# Altium PCB PCB方案验证板  12V5A 60W.PcbDoc
Units mil, origin at the board's own origin, x right, y up, seen from the top; angles counter-clockwise.
Board outline 3897.64 x 1771.65 mil, 2 copper layers (Top Layer, Bottom Layer); 59 components, 34 nets, 205 pads, 4 vias.
Unrouted connection lines stored in the file: 2.
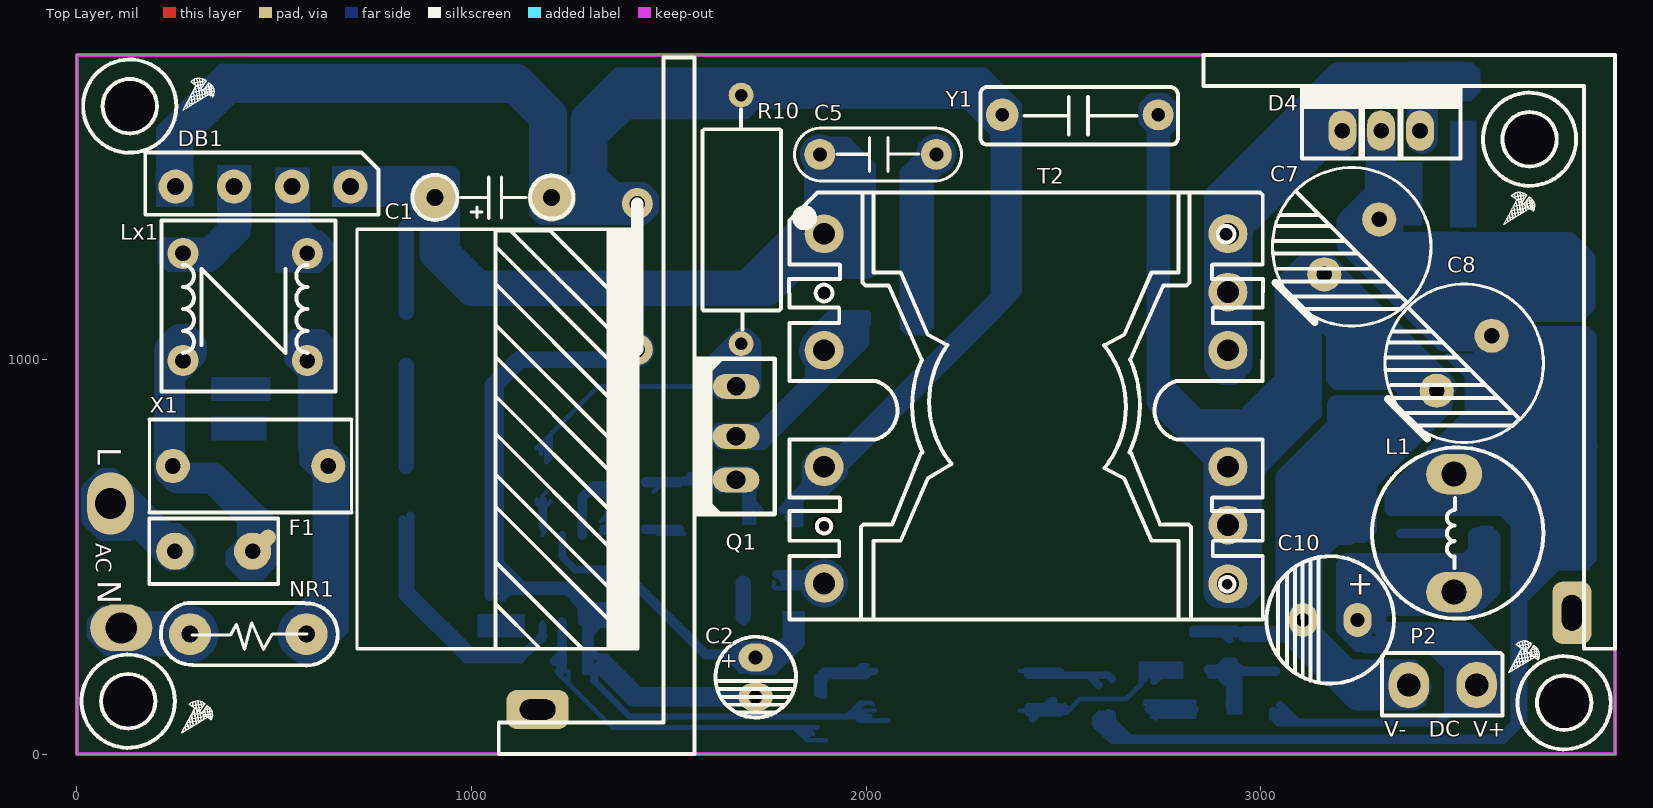
[diagram p0: Top Layer view]
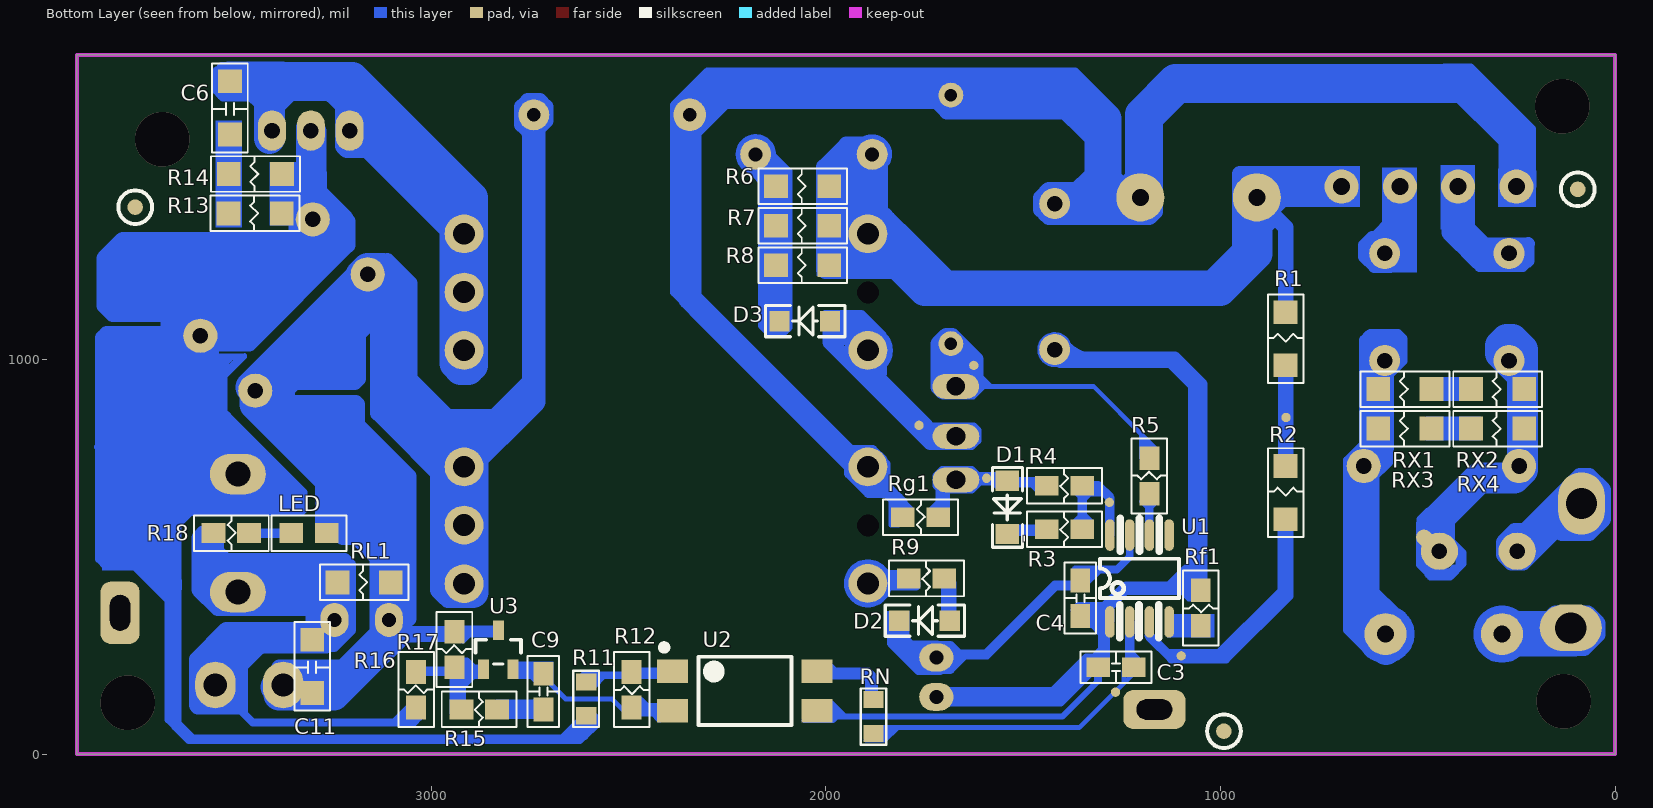
[diagram p1: Bottom Layer view, seen from below]

## Layer stack, top to bottom
Top Solder: solder mask 0.4, Solder Resist, Dk 3.5
Top Layer: signal copper 1.4
Dielectric1: dielectric 12.6, FR-4, Dk 4.8
Bottom Layer: signal copper 1.4
Bottom Solder: solder mask 0.4, Solder Resist, Dk 3.5

## Board outline
0,0 3897.64,0 3897.64,1771.65 0,1771.65

## Design rules (kind name [scope] priority, off if disabled: settings)
Clearance [All] p1: gap=10 ignorepadtopadclearanceinfootprint=FALSE except(0: Arc-Hole Track-Hole SMDPad-Hole THPad-Hole Via-Hole Fill-Hole Poly-Hole Region-Hole Text-Hole)
FabricationTestpoint [(IsPad And (OnTopLayer Or OnBottomLayer))] p1: side=3 testpointundercomponent=TRUE minsize=40 maxsize=100 preferedsize=60 minholesize=0 maxholesize=40 preferedholesize=32 testpointgrid=1 allowsidetop=TRUE allowsidebottom=TRUE usegrid=TRUE gridtolerance=0.01
PolygonConnect [All] p1: connectstyle=Relief reliefconductorwidth=10 reliefentries=4 polygonreliefangle="90 Angle" airgapwidth=10
RoutingLayers [All] p1: top layer_v5=FALSE bottom layer_v5=TRUE
RoutingVias [All] p1: holewidth=28 width=50 viastyle="Through Hole" minholewidth=28 minwidth=50 maxholewidth=28 maxwidth=50
SolderMaskExpansion [All] p1: expansion=4 istentingtop=FALSE
Width [All] p1: maxlimit=196.85 minlimit=10 preferedwidth=39.37
28 further rules are at their usual default settings.

## Classes and differential pairs
component class "12V5A TWO": C1 C2 C3 C4 C5 C7 C8 C9 C10 C11 D1 D2 D3 D4 DB1 F1 NR1 P2 Q1 R1 R2 R3 R4 R5 R6 R7 R8 R9 R10 R11 R12 R13 R14 R15 R16 R17 R18 Rf1 Rg1 RL1 RX1 RX2 RX3 RX4 U1 U2 U3 X1 Y1

## Components (designator, comment, footprint, x,y, rotation, side; value= is the part's Value field where it differs from the comment)
C1 "100uf" "Cin /400V/56uF Wo" 710,1330 r0 top
C2 "47uF/50V" "C Φ5*11 L=2.5" 1720,195 r270 top
C3 "103/0805" 0805-C 1310.08,219.55 r180 bottom
C4 "104/0805" 0805-C 1355.45,440.08 r270 bottom
C5 "630V222" CBB=7.5MM 2030,1520 r0 top
C6 "472" 1206-C 3510.3,1705.08 r270 bottom
C7 "1000uF/16V" "C 1000UF/16V" 3585,1060 r225 top
C8 "1000uF/16V" "C 1000UF/16V" 3300,1355 r225 top
C9 "104/0805" 0805-C 2716,203.27 r270 bottom
C10 "470uF/25V" "C= 3.5MM 8*15" 3107.2,340 r90 top locked
C11 "104" 1206-C 3302.17,290 r270 bottom
D1 "1N4148" "D 1N4148" 1540,625 r90 bottom
D2 "FR104" D/SOD123 1686.02,338 r0 bottom
D3 "FR107" D/SOD123 1989.25,1097 r0 bottom
D4 "MBR20100" "D TO-220" 3305,1580 r0 top
DB1 "KBP307" "DB D=1.1MM" 471.46,1438 r0 top
F1 "250V/3.15A" "F 3.15A L=5MM" 347.07,512.03 r0 top
L1 "4uH" L=7.6MM 3490,560 r90 top locked
LED "Comment" PCBComponent_1 3314.33,593 r0 bottom
Lx1 "18mH" LF=6.9MM 426.18,1133 r0 top (schematic designator T1)
NR1 "8D-11" NTC=7.5mm 581.69,304 r90 top
P2 "12V5A" OUT 3547,177 r270 top
Q1 "SJMN60R38F" MOSFET1 1670,695 r90 top
R1 "750K/1206" 1206-R 834.55,984.92 r90 bottom
R2 "750K/1206" 1206-R 834.55,594.92 r90 bottom
R3 "22R/0805" 0805-R 1440,570 r180 bottom
R4 "47R/0805" 0805-R 1440,680 r180 bottom
R5 "100R/0805" 0805-R 1180,750 r270 bottom
R6 "50K/2510/1W" 1206-R 1990.9,1339.45 r0 bottom
R7 "50K/2510/1W" 1206-R 1990.9,1239.45 r0 bottom
R8 "50K/2510/1W" 1206-R 1990.9,1439.45 r0 bottom
R9 "22R/0805" 0805-R 1790,445 r180 bottom
R10 "0.39/2W" "R  2W" 1683.07,1355 r90 top
R11 "1K/0805" "0805 RC" 2607.28,140 r270 bottom
R12 "1k/0805" 0805-R 2492.13,118.19 r90 bottom
R13 "51R/1206" 1206-R 3378.7,1370.45 r0 bottom
R14 "22R/1206" 1206-R 3377.87,1470.45 r0 bottom
R15 "2.2K/0805" 0805-R 2923.23,113.19 r180 bottom
R16 "39K/1%/0805" 0805-R 3038.39,208.19 r270 bottom
R17 "12.5K/1%/0805" 0805-R 2940.94,310 r270 bottom
R18 "5.1K/0805" 0805-R 3461.61,560 r0 bottom
Rf1 "Res1" 0805-R 1050,325 r90 bottom
Rg1 "10K/0805" 0805-R 1715,600 r0 bottom
RL1 "3.3K/1206" 1206-R 3102.12,435.45 r0 bottom
RN "1K/0805" "0805 RC" 1878.94,95 r270 bottom (schematic designator R11)
RX1 "1M/1206*4" 1206-R 229.92,825.45 r0 bottom
RX2 "1M/1206" 1206-R 229.92,925.45 r0 bottom
RX3 "1M/1206" 1206-R 464.92,825.45 r0 bottom
RX4 "1M/1206" 1206-R 464.92,925.45 r0 bottom
T2 "PQ2620" "T PQ2620" 2620,660 r0 top locked
U1 "OB2269CP" OB2269 1280,335 r90 bottom
U2 "PC817B" LC-SMD-4 2205,160 r180 bottom
U3 "TL431" LC-SOT-23(SOT-23-3) 2829.72,264.21 r180 bottom
X1 "224" CX=10mm 440,730 r180 top
Y1 "222" Y1 2345,1620 r0 top
? "Comment" lUOSI 304.13,95 r225 top
? "Comment" lUOSI 308.07,1673 r225 top
? "Comment" lUOSI 3666.34,247 r225 top
? "Comment" lUOSI 3654.53,1384 r225 top

## Footprints (in the part's own frame and the unit in brackets; to place one, negate y for a bottom-side part, rotate by r counter-clockwise, add the part's x,y. Pads: shape width x height; smd on the part's side, far side on the other; paste and mask are expansions set on the pad)
"0805 RC" [mm]
  rect 1.1x1.3 smd: 1(-1.088,0) 2(1.088,0)
  silkscreen extent -1.81,-0.82 1.81,0.82
0805-C [mil]
  rect 60x50 smd: 1(0.08,0.45) 2(90.08,0.45)
  silkscreen extent -45,-40 135,40
0805-R [mil]
  rect 60x50 smd: 1(0,0) 2(90,0)
  silkscreen extent -50,-45 140,45
1206-C [mil]
  rect 60x60 smd: 1(0.08,0.45) 2(135.08,0.45)
  silkscreen extent -45,-45 180,45
1206-R [mil]
  rect 60x60 smd: 1(0.08,0.45) 2(135.08,0.45)
  silkscreen extent -45,-45 180,45
"C 1000UF/16V" [mm]
  round 2.2 hole 1: 1(5,0) 2(0,0)
  silkscreen extent -2.6,-5.1 7.6,5.1
"C Φ5*11 L=2.5" [mm]
  oval 1.8x2.2 hole 0.9: 1(-1.27,0) 2(1.27,0)
  silkscreen extent -2.6,-2.6 2.6,2.6
"C= 3.5MM 8*15" [mm]
  oval 2.2x1.8 hole 0.9: 1(0,-3.5) 2(0,0)
  silkscreen extent -4.1,-5.85 4.1,2.35
CBB=7.5MM [mm]
  round 2 hole 0.9: 1(-3.75,0) 2(3.75,0)
  silkscreen extent -5.37,-1.71 5.37,1.7
"Cin /400V/56uF Wo" [mm]
  round 3.1 hole 1.1: 1(5.02,2.05) 2(12.52,2.05)
  silkscreen extent 0,-27 18.08,3.5
CX=10mm [mm]
  round 2.2 hole 1: 1(5,0) 2(-5,0)
  silkscreen extent -6.5,-3 6.5,3
"D 1N4148" [mm]
  rect 1.3x1.5 smd: +(1.713,0) -(-1.713,0)
  silkscreen extent -2.56,-0.96 2.56,0.95
"D TO-220" [mm]
  oval 1.8x2.6 hole 1: 1(-2.5,0) 1(2.5,0) 2(0,0)
  silkscreen extent -5.1,-1.8 5.1,2.7
D/SOD123 [mm]
  rect 1.3x1.3 smd: 1(0,0) 2(3.248,0)
  silkscreen extent -0.95,-1 4.15,1
"DB D=1.1MM" [mm]
  round 2.2 hole 1.1: +(5.625,0) -(-5.625,0) L(-1.875,0) N(1.875,0)
  silkscreen extent -7.58,-1.81 7.42,2.19
"F 3.15A L=5MM" [mm]
  round 2.4 hole 1: 1(-2.512,0.05) 2(2.487,0.05)
  round 0 all layers, no hole: ""(-3.063,-0.525)
  oval 1x2.2 all layers, no hole rot 135: ""(3.063,0.525)
  silkscreen extent -4.16,-2.05 4.14,2.15
L=7.6MM [mm]
  oval 2.6x3.6 hole 1.6: 1(3.8,0) 2(-3.8,0)
  silkscreen extent -5.51,-5.74 5.51,5.28
LC-SMD-4 [mm]
  rect 2x1.5 smd: A(-4.65,1.27) C(4.65,1.27) E(4.65,-1.27) K(-4.65,-1.27)
  silkscreen extent -5.4,-2.2 3,3, body extent -5.02,-2.42 5.01,2.42, height 3.9
LC-SOT-23(SOT-23-3) [mm]
  rect 0.7x1.25 smd: A(0,1.25) K(0.95,-1.25) R(-0.95,-1.25)
  silkscreen extent -1.46,-0.9 1.46,0.65, body extent -1.5,-1.5 1.5,1.5, height 1.3
LF=6.9MM [mm]
  round 2 hole 1: 1(4,-3.45) 2(4,3.45) 3(-4,-3.45) 4(-4,3.45)
  silkscreen extent -5.38,-5.45 5.81,5.56
lUOSI [mil]
  silkscreen extent -39,-35 56,31
MOSFET1 [mm]
  oval 1.6x3 hole 1.2: D(2.799,-0.005) G(0,0) S(6.012,-0.02)
  silkscreen extent -2.2,-2.51 7.86,2.49
NTC=7.5mm [mm]
  round 2.7 hole 1.1: 1(0,0) 2(0,7.5)
  silkscreen extent -2.02,-2.01 2.02,9.38
OB2269 [mil]
  oval 80x24 smd: 1(0,0) 2(0,-50) 3(0,-100) 4(0,-150) 5(220,-150) 6(220,-100) 7(220,-50) 8(220,0)
  silkscreen extent -40,-175 262,25
OUT [mm]
  oval 3x2.6 hole 1.5: GND(0.051,-4.369) VCC(0.051,0)
  silkscreen extent -2.01,-6.1 2.01,1.65
PCBComponent_1 [mil]
  rect 60x50 smd: 1(-50,33) 2(40,33)
  silkscreen extent -100,-12 90,78
"R  2W" [mm]
  round 1.6 hole 0.8: 1(8,0) 2(-8,0)
  silkscreen extent -7.09,-2.57 7.06,2.5
"T PQ2620" [mm]
  round 2.5 hole 1.4: 1(-18.461,16.724) 3(-18.461,9.223) 4(-18.461,1.723) 6(-18.461,-5.776) 7(7.539,-5.801) 8(7.539,-2.026) 9(7.539,1.724) 10(7.539,9.224) 11(7.539,12.973) 12(7.539,16.724)
  round 0 hole 1.4: 2(-18.461,12.949) 5(-18.461,-2.052)
  silkscreen extent -20.71,-8.11 9.78,19.39
Y1 [mm]
  round 2.1 hole 0.85: 1(0,0)
  round 2 hole 0.85: 2(10.033,0)
  silkscreen extent -1.4,-1.91 11.3,1.79

## Part data
C1 C2 C7 C8 C10: library part "Cap Pol2", "Polarized Capacitor (Axial)"
C3 C4 C5 C6 C9 C11 X1 Y1: library part Cap, "Capacitor"
D1 D2 D3 D4: library part "Diode BAS116", "Silicon Low Leakage Diode"
DB1: library part Bridge1, "Full Wave Diode Bridge"
F1: library part "Fuse 2", "Fuse"
L1: library part Inductor, "Inductor"
Lx1: library part "Trans Ideal", "Transformer (Ideal)"
NR1: library part NTC
P2: library part "Header 2", "Header, 2-Pin"
Q1: library part NMOS-2, "N-Channel Power MOSFET"
R1 R2 R3 R4 R5 R6 R7 R8 R9 R10 R11 R12 R13 R14 R15 R16 R17 R18 Rg1 RL1 RN RX1 RX2 RX3 RX4: library part Res1, "Resistor"
Rf1: "Resistor"
T2: library part T
U2: library part Optoisolator1, "4-Pin Phototransistor Optocoupler"

## Free pads (board coordinates)
  oval 118.11x157.48 hole 78.74: 1(85,635)
  oval 157.48x118.11 hole 78.74: 1(112.2,320)
  round 78.74 hole 39.37: 2(1420,1395) 3(1420,1025)
  round 39.37 smd far side: 6(94.49,1431) 6(991.14,58) 6(3750,1386)
  round 23.62 smd far side: 6(833.66,853) 6(1099.41,249) 6(1265.75,157) 6(1281.5,638) 6(1592.52,699) 6(1625,985) 6(1763.78,833)
  rrect50% 157.48x98.43 hole 51.18 slot 90.55 at 0 deg: 126(1167.32,113)
  rrect50% 98.43x157.48 hole 51.18 slot 90.55 at 90 deg: 126(3788.39,358)
  oct 78.74x39.37 on Bottom Solder rot 45: ""(3107.22,561.98) ""(3107.35,639.02) ""(3177.1,632.98) ""(3178.21,708.02) ""(3244.03,702.98) ""(3246.13,782.02) ""(3312.93,771.98) ""(3319.94,859.02) ""(3379.86,842.98) ""(3604.27,709.98) ""(3658.53,661.02)
  oct 78.74x39.37 on Bottom Solder rot 135: ""(3135.83,282) ""(3175.2,242) ""(3212.52,203.73) ""(3218.5,1072) ""(3229.33,1146) ""(3253.86,163.73) ""(3290.35,999) ""(3298.23,1079) ""(3299.21,1261) ""(3358.27,1279) ""(3358.27,938) ""(3365.81,1198.33) ""(3375,1007) ""(3432.41,1135.67) ""(3434.06,1207) ""(3434.06,1274) ""(3499.02,1073) ""(3500.98,1207) ""(3509.76,283.73) ""(3512.8,1132) ""(3545.2,248.73) ""(3572.83,1146) ""(3646.65,1101.91) ""(3675.2,1020.91)
  oct 78.74x39.37 on Bottom Solder: ""(3317.75,385.52) ""(3328.9,464.48) ""(3364.17,299) ""(3397.8,383.48) ""(3413.55,465.48) ""(3418.31,299) ""(3466.54,299) ""(3571.31,641.23)
  oct 39.37x78.74 on Bottom Solder: ""(3566.52,785.13) ""(3566.52,877.63) ""(3566.52,970.13) ""(3631.32,879.87) ""(3631.32,975.87) ""(3633.29,790.87) ""(3696.68,750.31) ""(3698.65,847.31) ""(3698.65,939.31)

## Via types
v1: diameter 137.8, hole 137.8, Top Layer to Bottom Layer, 4 vias

## Nets (pads, with @x,y where several pads share a name; then routed paths per layer and width w, separated by ;. In a path a pad name is that pad's centre, name@x,y a point inside that pad or via, vN(x,y) a via of type N, cw(c..) or ccw(c..) an arc to the next point about the centre after c; other vN are vias at no path point)
GND: C7.1 C8.1 C10.2 C11.2 LED.1 P2.GND R17.1 RL1.1 T2.7 T2.8 T2.9 U3.A Y1.2 | length 3895.4
  Bottom Layer w10: Y1.2 2740,904.67 T2.9@2907.47,737.19 ; T2.7@2905,438.46 T2.8@2905,580.22 ; T2.8 T2.8@2905,580.22 ; C10.2@3100,305 C10.2@3100,332.8 ; RL1.1@3100,415 C10.2@3100,332.8 ; 3137.2,305 3172.2,270 3175,270 3295,150 P2.GND@3385,150 ; T2.8@2905,580.22 2905,734.72 T2.9@2907.47,737.19 ; T2.9@2907.47,737.19 T2.9 2932.22,727.85 3099.41,895.04 3099.41,1154.41 C8.1 3445.81,930.81 C7.1 3107.2,582.2 3107.2,560 C10.2 C10.2@3100,332.8
  Bottom Layer w23.62: U3.A 2937.52,313.43 R17.1 3022.32,310 3037.32,295 3119.09,295 ; 3107.2,560 LED.1
GND1: C1.2 C2.2 C3.1 C4.2 DB1.- pad.2 R10.1 Rf1.2 Rg1.2 T2.4 U1.1 U2.E Y1.1 | length 6130.7
  Bottom Layer w10: Rf1.2@1060,415 1240,415 ; C1.2@1210,1420 C1.2@1230,1440 ; C1.2@1215,1455 C1.2@1230,1440 ; U1.1@1280,337.08 U1.1 ; C4.2 1340,335 U1.1 ; C2.2 1385,145 C3.1 ; Rg1.2 1805,639.66 T2.4 1952.85,727.85 2340,1115 2340,1655 2305,1690 1360,1690 1265,1595 1265,1475 C1.2@1230,1440 ; U2.E 1977.6,110 1962.6,95 1400.75,95 1310,185.75 C3.1 ; U1.1 1290.35,324.65 1290.35,239.65 C3.1
  Bottom Layer w23.62: 1240,425 1280,385 1280,375 U1.1@1280,337.08
  Bottom Layer w39.37: 1270,1360 pad.2@1435.47,1360
  Bottom Layer w78.74: DB1.-@247.36,1465 247.36,1552.36 405,1710 1115,1710 1202.91,1622.09 C1.2 1404.29,1410.71 pad.2
NetC1_1: C1.1 C5.1 DB1.+ R1.2 R6.1 R7.1 R8.1 T2.1 | length 3262
  Bottom Layer w10: R1.2 835,1338.08 895.96,1399.04 C1.1@907.63,1387.37
  Bottom Layer w19.68: 991.14,1215 1740.16,1215
  Bottom Layer w39.37: C5.1 C5.1@1904.05,1498.32 ; T2.1 1955,1318.41 1957.14,1320.55 ; 1990,1305 R6.1@1990,1353.41 ; C5.1@1904.05,1498.32 cw(c1882.36,1520) 1913.03,1520 cw(c1882.36,1520) C5.1@1904.05,1498.32 ; C5.1@1904.05,1498.32 1990,1412.36 R6.1@1990,1353.41 ; 1957.14,1320.55 cw(c1893.19,1318.41) 1957.18,1318.41 cw(c1893.19,1318.41) 1847.94,1273.16 cw(c1893.19,1318.41) 1957.14,1320.55 ; 1957.14,1320.55 R6.1@1990,1353.41
  Bottom Layer w78.74: C1.1 907.63,1387.37 907.63,1267.37 1000,1175 1749.78,1175 1847.94,1273.16 T2.1
NetC2_1: C2.1 C4.1 D2.2 U1.7 | length 814.2
  Bottom Layer w10: C4.1 1375,420 1415,420 1590,245 C2.1 1785,245 1817.87,277.87 D2.2@1817.87,330
  Bottom Layer w19.68: U1.7 1230,500 1262.5,467.5 1327.5,467.5 C4.1
NetC3_2: C3.2 pad.6@1265.75,157 RN.2 U1.2 | length 844.9
  Bottom Layer w10: C3.2 1225,225 1230,230 U1.2
  Bottom Layer w11.81: C3.2 1220,230 C3.2@1225,225 ; C3.2@1245,210 1245,180 1357.82,67.18 RN.2@1876.97,67.18
NetC5_2: C5.2 D3.2 R6.2 R7.2 R8.2 | length 590.6
  Bottom Layer w10: 2125,1135 2125,1205 ; R7.2@2125,1225 2125,1239 2125,1405 ; C5.2 C5.2@2182.64,1525
  Bottom Layer w39.37: C5.2@2155.5,1497.86 ccw(c2177.64,1520) 2208.95,1520 ccw(c2177.64,1520) C5.2@2155.5,1497.86
  Bottom Layer w59.06: 2125,1405 2125,1467.36 2155.5,1497.86 C5.2
NetC6_1: C6.1 D4.1 T2.10 T2.11 T2.12 | length 1190.4
  Bottom Layer w10: T2.10@2905,1030 T2.12@2905,1325.28 ; T2.12 2916.81,1456.81 3040,1580 3206.58,1580 3206.58,1656.58 3265,1715 3375,1715 3403.43,1686.57 D4.1@3403.43,1580
NetC6_2: C6.2 R13.2 R14.2
NetC7_2: C7.2 C8.2 D4.2 L1.1 R11.2 R13.1 R14.1 | length 15135.3
  Bottom Layer w10: D4.2@3275,1580 3285.43,1569.57 3300,1555 3300,1413.78 3300,1409.09 3300,1385 3275,1360 3295,1360 C8.2 ; R14.1@3357.52,1460 3367.52,1470 R14.1 ; R13.1@3367.36,1358.58 R13.1 ; L1.1 3575,794.61 ; L1.1@3503.27,709.61 3585,791.34 3585,828.35 3585,883.74 3585,952.24 3585,974.96 3585,1007.76 3585,1015.71 3585,1017.52 C7.2 ; 3517.72,1075 3526.57,1083.86 3527.72,1085 3547.24,1085 C7.2@3554.13,1085
  Bottom Layer w11.81: R11.2@2600.39,105 2600.39,80.35 2640.75,40 ; 3600.39,660 3600.39,648.39 3638.78,610 3638.78,627.36 3631.89,634.25 ; 3624.02,660 3631.89,652.13 3631.89,634.25 ; 3631.89,620 3631.89,620.12 ; 3637.8,685 3642.72,680.08 3642.72,660 3642.72,593.86 ; 3654.53,665 3654.53,660 3654.53,632.28 ; 3655.51,581.06 3654.53,582.05 3654.53,611.77 ; 3672.24,650 3654.53,632.28 ; 3687.01,655 3654.53,622.52 ; 3702.76,660 3654.53,611.77 ; 3631.89,620.12 3631.89,634.25 ; 3631.89,620.12 3602.01,650 3616.14,650 3631.89,634.25 ; 3649.61,617.6 3654.53,622.52 ; 3649.61,617.6 3649.61,627.36 3654.53,632.28 ; 3649.61,617.6 3649.61,610 3652.76,610 3654.53,611.77 ; 3654.53,611.77 3654.53,622.52 ; 3654.53,622.52 3654.53,632.28
  Bottom Layer w19.68: 2640.75,40 3604.25,40 3642.72,78.46 3642.72,593.86 ; L1.1 3503.27,709.61 3526.97,709.61 3530.37,706.2 3576.57,660 3642.72,593.86 ; 3517.72,1075 3517.72,1045.04 3522.76,1040 ; 3547.24,1095 3547.24,1085 3547.24,1045.51 3547.24,1040 3547.24,1015.51 ; 3568.9,935 3560.04,943.86 3547.24,956.65 3547.24,977.95 3547.24,978.7 3547.24,979.76 3547.24,1015.51 ; 3577.76,985 3566.02,996.73 3565.65,997.11 3565.12,997.64 3547.24,1015.51 ; 3637.8,1135 3637.8,1124.17 3637.8,1115 3637.8,1068.54 3641.34,1065 3646.34,1060 3649.61,1056.73 ; 3643.7,1025 3649.61,1030.91 3649.61,1035.91 3649.61,1044.92 3649.61,1056.73 ; 3649.61,1155 3649.61,1124.17 3649.61,1115 3649.61,1065 3649.61,1060 3649.61,1056.73 ; 3654.53,582.05 3642.72,593.86 ; 3655.51,581.06 3686.02,550.55 ; 3666.34,1040 3649.61,1056.73
  Bottom Layer w39.37: 3270.35,1310 3251.97,1328.39 3244.09,1336.26 3244.09,1357.87 3244.09,1369.17 3285.43,1410.51 3285.43,1420 ; D4.2@3285.43,1580 3285.43,1569.57 3285.43,1420 ; 3287.4,1420 3285.43,1420 ; D4.2 3305,1355.12 C8.2@3305.12,1355 ; 3306.1,1409.29 3306.1,1425 ; 3307.09,1303.82 3332.68,1303.82 ; 3311.02,1420.94 3311.02,1445 ; C8.2@3322.83,1365 D4.2@3322.83,1590 ; 3332.68,1435 3332.68,1303.82 ; 3336.61,1295 3332.68,1298.94 3332.68,1303.82 ; 3379.92,1295 3410.94,1295 3565.94,1140 ; 3386.81,1285 3386.81,1284.45 3546.26,1125 ; 3422.24,1305 3499.69,1305 3500.87,1303.82 ; 3425.2,660 3576.57,660 3600.39,660 3624.02,660 3642.72,660 3654.53,660 3702.76,660 ; 3526.57,1100 3526.57,1095 3526.57,1083.86 3526.57,1066.18 3547.24,1045.51 C7.2@3552.76,1040 ; 3535.43,795 3535.43,834.17 3535.43,967.95 3547.24,979.76 3565.12,997.64 3579.72,1012.24 ; 3538.39,775 3538.39,781.73 3538.39,825 ; 3546.26,770 3546.26,789.61 3546.26,832.87 ; 3553.15,1300 3553.15,1275.75 3693.9,1135 ; 3557.09,843.7 3546.26,832.87 ; C7.2@3563.98,1085 3573.5,1085 C7.2@3600.51,1085 ; C7.2@3570.87,1040 C7.2@3552.76,1040 ; 3575.79,819.13 3560.04,834.88 3560.04,858.78 3560.04,943.86 3560.04,950 3585,974.96 3601.4,991.36 ; 3577.76,945 3585,952.24 3612.76,980 ; C7.2@3579.72,1040 3579.72,1013.03 ; 3583.66,1285 3593.19,1285 3738.19,1140 ; 3585,1015.71 3581.02,1011.73 ; C7.2 3588.62,1060 3593.5,1064.88 C7.2@3593.62,1065 ; C7.2@3593.5,1065 C7.2@3593.62,1065 ; C7.2@3603.35,1040 3603.35,1035.87 3585,1017.52 3580.12,1012.64 ; 3608.27,1130 3608.27,1096.89 ; C7.2@3611.42,1085 C7.2@3609.53,1085 ; 3622.05,1015 3622.05,1012.01 3601.4,991.36 ; 3622.05,1115 3626.38,1115 ; 3623.03,980 3612.76,980 ; 3654.53,1040 3649.61,1044.92 3634.53,1060 ; 3655.51,1030 3649.61,1035.91 C7.2@3625.51,1060 ; 3675.2,1290 3675.2,1275.31 3780.51,1170 ; 3702.76,1295 3702.76,1286.54 3794.29,1195 ; 3723.43,790 3726.38,792.95 3726.38,1030 ; 3731.3,1290 3736.34,1290 3791.34,1235 ; 3765.75,799.29 3765.75,1021.97 3727.72,1060 ; 3789.37,773.03 3789.37,1048.27 3777.64,1060 3727.72,1060 ; 3831.69,705 3831.69,1055 3821.69,1065 3649.61,1065 3641.34,1065 3629.53,1065 ; 3285.43,1420 3280.79,1420 3211.61,1350.83 3211.61,1290 3461.61,1040 3522.76,1040 3547.24,1040 C7.2@3552.76,1040 ; 3332.68,1303.82 3445,1303.82 ; 3445,1303.82 3500.87,1303.82 ; 3445,1303.82 3590.55,1158.27 ; 3500.87,1303.82 3635.83,1168.86 3635.83,1124.17 ; 3500.87,1303.82 3612.68,1303.82 ; 3538.39,825 3546.26,832.87 ; 3538.39,825 3538.39,837.13 3538.39,969.84 3547.24,978.7 3565.65,997.11 3579.72,1011.18 3579.72,1012.24 ; 3546.26,832.87 3546.26,845 3546.26,976.97 3547.24,977.95 3566.02,996.73 3581.02,1011.73 ; C7.2@3552.76,1040 3579.72,1013.03 ; 3579.72,1012.24 3579.72,1013.03 ; 3579.72,1012.24 3580.12,1012.64 ; 3579.72,1013.03 3580.12,1012.64 ; 3580.12,1012.64 3581.02,1011.73 ; 3581.02,1011.73 3585,1007.76 3601.4,991.36 ; 3590.55,1158.27 3601.38,1147.44 ; 3590.55,1158.27 3590.55,1094.96 C7.2@3600.51,1085 ; C7.2@3593.62,1065 C7.2@3601.38,1065 ; C7.2@3593.62,1065 C7.2@3601.38,1072.76 ; C7.2@3600.51,1085 C7.2@3601.38,1084.13 ; C7.2@3600.51,1085 C7.2@3601.38,1085 ; 3601.4,991.36 3612.76,980 ; C7.2@3601.38,1065 C7.2@3620.51,1065 ; C7.2@3601.38,1065 C7.2@3601.38,1072.76 ; C7.2@3601.38,1065 3601.38,1060 C7.2@3625.51,1060 ; C7.2@3601.38,1072.76 C7.2@3601.38,1084.13 ; C7.2@3601.38,1072.76 C7.2@3607.07,1078.44 ; C7.2@3601.38,1084.13 C7.2@3601.38,1085 ; C7.2@3601.38,1084.13 C7.2@3607.07,1078.44 ; C7.2@3601.38,1085 C7.2@3601.38,1090 ; C7.2@3601.38,1085 C7.2@3609.53,1085 ; C7.2@3601.38,1090 3608.27,1096.89 ; C7.2@3601.38,1090 3601.38,1147.44 ; 3601.38,1147.44 3630.1,1118.72 ; C7.2@3607.07,1078.44 C7.2@3620.51,1065 ; C7.2@3607.07,1078.44 C7.2@3611.57,1082.95 ; 3608.27,1096.89 3626.38,1115 ; 3608.27,1096.89 3608.27,1086.26 C7.2@3609.53,1085 ; C7.2@3609.53,1085 C7.2@3611.57,1082.95 ; C7.2@3611.57,1082.95 3629.53,1065 ; C7.2@3611.57,1082.95 3635.83,1107.2 3635.83,1112.99 ; 3612.68,1303.82 3618.11,1303.82 ; 3612.68,1303.82 3792.32,1124.17 3649.61,1124.17 3637.8,1124.17 3635.83,1124.17 ; 3618.11,1303.82 3750.39,1303.82 ; 3618.11,1303.82 3806.93,1115 ; C7.2@3620.51,1065 3629.53,1065 ; C7.2@3620.51,1065 C7.2@3625.51,1060 ; C7.2@3625.51,1060 3634.53,1060 ; 3626.38,1115 3630.1,1118.72 ; 3626.38,1115 3633.82,1115 ; 3629.53,1065 3634.53,1060 ; 3630.1,1118.72 3635.55,1124.17 3635.83,1124.17 ; 3630.1,1118.72 3633.82,1115 ; 3633.82,1115 3635.83,1115 ; 3633.82,1115 3635.83,1112.99 ; 3634.53,1060 3646.34,1060 3649.61,1060 3727.72,1060 ; 3635.83,1112.99 3635.83,1115 ; 3635.83,1115 3637.8,1115 3649.61,1115 3806.93,1115 ; 3635.83,1115 3635.83,1124.17 ; 3750.39,1303.82 3781.81,1303.82 3828.74,1256.89 3828.74,1136.81 3806.93,1115 ; 3750.39,1303.82 3806.93,1247.28 3806.93,1115
  Bottom Layer w78.74: 3234.25,1348.03 3244.09,1357.87 3300,1413.78 3303.15,1416.93 3303.15,1470 ; 3251.97,1350 3251.97,1328.39 3251.97,1286.42 3288.39,1250 ; 3255.91,1365 3300,1409.09 3300.2,1409.29 ; 3265.75,1320 3290.91,1320 C8.2@3295,1315.91 ; C8.2@3295,1360 C8.2@3295,1315.91 ; 3453.74,1095 3526.57,1095 3547.24,1095 3563.5,1095 3573.5,1085 3593.5,1065 3593.5,1064.88 3593.5,1047.2 C7.2@3591.3,1045 ; 3475.91,1060 3295,1240.91 C8.2@3295,1315.91 ; L1.1 3490,733.35 3538.39,781.73 3546.26,789.61 3575.79,819.13 3585,828.35 3593.5,836.85 ; 3505.91,1105 3307.09,1303.82 C8.2@3295,1315.91 ; C7.2@3576.77,1094.8 C7.2@3576.77,1095 ; 3650.59,935 3636.26,935 3585,883.74 3560.04,858.78 3546.26,845 3538.39,837.13 3535.43,834.17 3421.26,720 3421.26,690.98 3432.24,680 3504.17,680 3530.37,706.2 3651.57,827.4 3651.57,1020 ; 3687.99,782.8 3687.99,1035.2
NetC9_1: C9.1 R12.1 U2.K U3.K | length 451.9
  Bottom Layer w10: U2.K 2487.13,110 2492.13,105 2507.24,105 2542.24,140 2659.41,140 2724.41,205 2782.32,205 U3.K
NetC9_2: C9.2 R15.2 | length 108.8
  Bottom Layer w10: C9.2@2724.41,115 R15.2@2833.23,115
NetD1_+: D1.+ pad.6@1592.52,699 Q1.G R4.1 Rg1.1 | length 236.2
  Bottom Layer w10: R4.1 1527.58,680 D1.+ 1667.42,692.42 Q1.G
NetD1_-: D1.- R3.1 | length 105.1
  Bottom Layer w10: R3.1 1460,570 1472.42,557.58 D1.-
NetD2_1: D2.1 R9.2 | length 99.1
  Bottom Layer w10: D2.1@1690,330 1700,340 R9.2@1700,425
NetD3_1: D3.1 Q1.D T2.3 | length 585.6
  Bottom Layer w10: Q1.D 1705.2,805.2 T2.3@1881.23,981.23 ; T2.3 1915.38,1023.13 1933.03,1040.77 D3.1
  Bottom Layer w39.37: T2.3@1881.23,981.23 cw(c1893.19,1023.13) T2.3@1933.03,1040.77
NetDB1_L: DB1.N Lx1.2 | length 200.7
  Bottom Layer w39.37: DB1.N@542.64,1465 542.64,1320.67 Lx1.2@582.48,1280.83
NetDB1_N: DB1.L Lx1.4 | length 285.8
  Bottom Layer w39.37: Lx1.4@267.52,1280.83 350.83,1280.83 395,1325 DB1.L@395,1465
NetF1_1: F1.1 F1.@226.5,491.36 pad.1@85,635 | length 316.8
  Bottom Layer w10: F1.1@203.86,505 F1.1@226.5,482.36
  Bottom Layer w39.37: pad.1@85,580 85,635 140,635 248.15,526.85 F1.1 F1.1@248.15,505
NetF1_2: F1.2 F1.@467.64,532.7 Lx1.3 RX1.1 RX2.1 X1.1 | length 633.3
  Bottom Layer w10: Lx1.3@267.52,1009.17 267.52,962.52 RX2.1 243.15,911.85 X1.1 285,730 445,570 F1.2 F1.2@445,505
NetLED1_1: LED.2 R18.1 | length 107.3
  Bottom Layer w23.62: LED.2 R18.1
NetNR1_1: Lx1.1 NR1.1 RX3.2 RX4.2 X1.2 | length 1059.8
  Bottom Layer w10: Lx1.1@582.48,1009.17 582.48,942.52 RX4.2 RX3.2 636.85,788.15 X1.2 636.85,311.57
  Bottom Layer w39.37: 635.75,304 ccw(c581.69,304) 635.75,304
NetNR1_2: NR1.2 pad.1@112.2,320 | length 439.5
  Bottom Layer w39.37: pad.1@112.2,320 220,320 ; NR1.2@339.21,304 ccw(c286.42,304) NR1.2@339.21,304
NetQ1_S: pad.6@1625,985 Q1.S R5.1 R10.2 | length 719.5
  Bottom Layer w10: Q1.S 1670.8,1035.8 R10.2@1685,1050
  Bottom Layer w11.81: R5.1@1190,740 1190,800 1321.7,931.7 Q1.S
NetR1_1: pad.6@833.66,853 R1.1 R2.2 | length 255
  Bottom Layer w10: R2.2 R1.1
NetR2_1: pad.6@1099.41,249 R2.1 U1.3 | length 669.1
  Bottom Layer w10: R2.1 835,400 995,240 1125,240 1180,295 U1.3
NetR3_2: pad.6@1281.5,638 R3.2 R4.2 U1.8 | length 312.8
  Bottom Layer w10: R3.2@1325,555 1350,580 R4.2
  Bottom Layer w19.68: U1.8 1280,650 1310,680 R4.2
NetR5_2: R5.2 U1.6 | length 114.1
  Bottom Layer w10: U1.6 1180,655 R5.2@1190,665
NetR9_1: R9.1 T2.6 | length 376.1
  Bottom Layer w10: R9.1 1802.42,432.58 1852.02,432.58 T2.6 ; T2.6@1884.93,425 T2.6@1891.38,431.45
  Bottom Layer w39.37: T2.6@1852.02,432.58 cw(c1893.19,432.58) 1934.36,432.58 cw(c1893.19,432.58) T2.6@1852.02,432.58
NetR11_1: R11.1 R12.2 U2.A | length 218.5
  Bottom Layer w10: U2.A 2477.13,210 2492.13,195 R11.1@2600.39,195
NetR15_1: R15.1 R16.1 R17.2 U3.R | length 177.5
  Bottom Layer w23.62: U3.R 2935.94,215 R17.2 2950.94,210 R16.1@3038.39,210
NetRf1_1: Rf1.1 U1.4 | length 74.1
  Bottom Layer w10: Rf1.1@1060,325 1120,325 U1.4
NetRX1_2: RX1.2 RX3.1 | length 100
  Bottom Layer w10: RX1.2 RX3.1
NetRX2_2: RX2.2 RX4.1 | length 100
  Bottom Layer w10: RX2.2 RX4.1
VCC: C10.1 C11.1 L1.2 P2.VCC R16.2 R18.2 RL1.2 | length 1402.3
  Bottom Layer w10: L1.2@3504.8,425.2 3489.61,410 3315,410 C10.1 3245,315 3455,315 P2.VCC@3575,195 ; L1.2@3551.61,425 R18.2
  Bottom Layer w19.68: R16.2@3031.08,109.59 3060.67,80 3452,80 P2.VCC
pads on no net: RN.1 T2.2 T2.5 U1.5 U2.C
copper on no net: | length 80927.6
  Bottom Layer w11.81: 1123.03,431.97 1238.03,431.97 1251.97,418.03 ; 1165,645 1165,635 1180,620 1200,640 ; 1165,775 1190,800 1175,785 1175,770 ; 1175,645 1175,575 1180,570 ; 1175,760 1175,770 ; 1180,560 1185,565 1185,645 ; 1190,740 1200,750 1200,810 ; 1190,785 1175,770 ; 1215,210 1250,175 ; 1225,210 1225,200 1232.5,192.5 ; 1278.54,1005 1301.53,1005 ccw(c1301.53,1125.71) 1386.88,1040.36 1404.53,1058 ; 1302.17,1480 1308.27,1480 1358.27,1430 ; 1304.13,1495 1308.03,1495 1373.03,1430 ; 1311.02,665 1324.49,665 1344.49,645 1346.38,645 1351.38,640 1351.38,647.28 1369.09,665 ; 1327.76,590 1345.47,607.72 1351.38,607.72 ; 1334.61,1005 1310.04,1005 1363.86,1005 ; 1348.43,1009 1355.53,1009 1404.53,1058 ; 1351.38,615 1351.38,607.72 ; 1369.09,590 1351.38,607.72 ; 1369.08,1009 1369.08,1012.3 1388.78,1032 ; 1450.79,1003.65 1450.79,1045 1437.79,1058 1404.53,1058 ; 1461.61,665 1486.61,690 1494.09,690 ; 1563.98,675 1564.8,675 1574.8,685 ; 1565,931.7 1581.7,931.7 1615,965 ; 1610,945 1596.7,931.7 1590,931.7 ; 1620,920 1608.3,931.7 1590,931.7 ; 1705,905 1625,905 1598.3,931.7 1590,931.7 ; 1709.65,640 1729.65,620 1734.25,620 1710,644.25 1710,670 ; 1765.75,435 1765.75,423.94 1769.68,420 1879.93,420 1884.93,425 ; 1801.18,67.18 1818.21,67.18 1850.39,35 1898.62,35 ; 1813.98,445 1835.98,445 1875.98,485 1910.94,485 1940.94,455 1940.94,413.54 1912.4,385 1875.71,385 1830.71,430 ; 1814.96,580 1835.63,580 1835.63,650.63 ; 1852.36,45 1834.65,62.72 1834.65,65 ; 1858.27,50 1843.27,65 1834.65,65 ; 1866.14,50 1851.14,65 1834.65,65 ; 1884.84,175 1884.84,176.38 1908.46,200 ; 1884.84,195 1884.84,146.97 1886.81,145 ; 1894.68,145 1894.68,205.08 1899.61,210 ; 1894.68,195 2000.83,195 2010.83,205 ; 1944.88,95 1949.25,95 ; 1967.52,205 1987.52,225 2002.95,225 ; 1975.39,108.86 1976.54,110 1996.06,110 1986.06,100 1966.54,100 1996.54,130 2001.97,130 ; 2016.73,125 2011.73,130 1984.25,130 1949.25,95 ; 2055.12,85 1981.3,85 1971.3,95 1949.25,95 ; 3338.9,645 3448.82,645 ; 3377.95,680 3392.72,665.24 3392.72,665 3382.72,655 3342.52,655 ; 3406.5,725 3390.71,725 3330.71,665 3342.87,665 3382.87,705 3382.87,695.35 3342.52,655 ; 3422.24,760 3413.9,760 3318.9,665 3318.9,617.84 3327.05,609.69 3649.61,609.69 ; 3485.24,1009.29 3485.24,1007.32 3527.56,965 ; 3496.06,1005 3503.54,1005 3528.54,980 ; 3510.83,997.72 3544.96,997.72 3547.24,1000 ; 3518.7,960 3472.44,1006.26 3472.44,1010 3473.15,1009.29 3576.77,1009.29 ; 3518.7,1000 3521.42,1000 3536.42,985 ; 3342.52,655 3376.97,689.45 3404.53,661.89 3404.53,655 3342.52,655
  Bottom Layer w12.99: 2492.13,105 2507.24,105 2542.24,140 2659.41,140 2696.85,177.44 2696.85,190.16 2706.69,200
  Bottom Layer w15.75: 655,1445 675,1425 720,1425 750,1455 ; 1075,395 1080,395 1100,415 ; 1310,185.75 1400.75,95 1756.89,95 2007.87,95
  Bottom Layer w19.68: 209.65,1450 209.65,1584.06 365.59,1740 433.07,1740 ; 369.09,1660 1095.43,1660 1162.4,1593.03 1162.4,1440 ; 387.8,1675 1088.35,1675 1103.35,1660 ; 417.32,570 417.32,537.64 394.68,515 394.68,476.89 401.57,470 408.31,470 418.31,460 461.61,460 461.61,460.39 486.22,485 ; 425.2,570 425.2,549.37 385.83,510 385.83,482.48 418.31,450 467.44,450 472.44,455 472.44,457.36 495.08,480 495.08,584.25 479.33,600 ; 473.43,615 493.11,595.32 ; 528.54,1455 528.54,1249.68 548.23,1230 586.61,1230 ; 563.98,283 590.98,256 621.55,256 679.13,313.58 679.13,745 615.16,808.98 615.16,835 ; 572.83,780 572.83,738.31 616.14,695 ; 825,595 825,400 985,240 1125,240 1180,295 1180,325 ; 845,395 845,605 ; 845,405 845,390 995,240 ; 845,415 1020,240 ; 947.83,1425 947.83,1246.89 954.72,1240 ; 960,1232.52 967.52,1225 ; 1060.04,1700 1073.86,1700 1133.86,1640 ; 1240,425 1245,425 1305,365 ; 1280,375 1360,375 1370,365 ; 1280,555 1280,640 ; 1285.43,1560 1311.26,1560 1399.61,1648.35 ; 1290,1480 1310,1480 ; 1295,270 1325,240 ; 1295,300 1330,335 ; 1310,185.75 1310,220 ; 1310.04,1570 1310.04,1571.26 1388.78,1650 ; 1313.98,1500 1313.98,1562.72 1421.26,1670 ; 1315,467.5 1367.5,467.5 ; 1320,225 1350,225 1430,145 1735,145 ; 1320,245 1340,245 1425,160 ; 1320,680 1350,680 ; 1323.82,1675 1323.82,1685.71 1368.11,1730 2300,1730 2385,1645 ; 1325.79,1410.71 1325.79,1580.35 ; 1330,225 1335,225 1400,160 ; 1345,430 1307.5,467.5 1305,467.5 1317.5,467.5 1350,435 ; 1365,430 1420,430 1595,255 1710,255 ; 1373.03,1645 2280,1645 2306.1,1618.9 ; 1390,160 1740,160 ; 1464.57,1190 1470.91,1190 ; 1555,705 1615,705 1630,720 1705,720 1720,705 1720,680 1710,670 1630,670 1607.58,692.42 1600,692.42 ; 1660,255 1665,255 1700,220 ; 1730,130 1405,130 1315,220 1310,220 ; 1735,780 1630,780 1615,795 1615,820 1625,830 1760,830 ; 1745,145 1400,145 1325,220 1310,220 ; 1765,235 1830,300 1830,335 ; 1765,260 1800,295 1800,345 ; 1775,255 1810,290 1810,330 ; 1782.5,277.5 1717.5,277.5 1690,250 1690,245 1690,230 1710,210 1765,210 1835,280 1835,330 ; 1876.97,152.82 1876.97,194.25 1892.72,210 2021.93,210 ; 1891.5,1280 1906.5,1295 ; 1965,775 2385,1195 2385,1605 ; 2103.35,1072 2105.35,1070 ; 2175.2,1556 2174.49,1556 2094.49,1476 2094.49,1080.86 2105.35,1070 ; 2199.8,1527 2199.8,1497.4 2162.4,1460 2162.4,1085.75 2146.65,1070 2105.35,1070 ; 2275,1715 2315,1715 2385,1645 ; 2355,1140 2385,1170 2385,1215 ; 2355,1575 2385,1605 ; 2370,1625 2375,1620 2375,1185 ; 2405.51,210 2490.32,210 2492.13,208.19 ; 2409.45,200 2498.03,200 2613.03,200 2623.03,190 ; 2410.43,105 2492.13,105 ; 2411.42,120 2500.91,120 2505.91,115 ; 2421.26,90 2436.26,105 2448.82,105 ; 2453.74,120 2468.74,135 2475.39,135 ; 2548.23,200 2563.58,200 2588.58,175 ; 2614.17,105 2614.17,65 2639.17,40 2640.75,40 ; 2615.16,89 2618.4,89 2662.4,45 ; 2615.16,94 2615.16,79.42 2651.57,43 ; 2623.03,100 2623.03,56.14 2625.98,53.19 ; 2669.29,40 2627.95,40 2590.55,77.4 2590.55,100 2581.69,91.14 2581.69,75 2611.69,45 2614.17,45 2624.17,35 3614.17,35 3647.64,68.46 ; 2710.63,130 2738.86,130 2758.86,110 2748.27,110 2733.27,95 ; 2715.55,113.19 2833.23,113.19 ; 2728.35,215 2792.32,215 2759.33,215 2729.33,185 ; 2776.57,113.19 2792.91,113.19 ; 2809.06,125 2797.24,113.19 2792.91,113.19 ; 2827.76,305 2935.94,305 2940.94,310 ; 2884.84,305 2905.28,305 2920.28,290 ; 2889.76,215 2909.76,235 2932.09,235 ; 2923.23,113.19 2921.26,115.16 2921.26,210 2921.26,201.73 ; 2933.07,160 2893.07,200 2873.03,200 ; 2933.07,170 2903.07,200 2873.03,200 ; 2937.99,185 2921.26,201.73 ; 2938.98,195 2938.98,148.7 2920.28,130 2941.93,151.65 2941.93,205 ; 2952.76,295 3085.55,295 3090.55,300 ; 3000,305 3085.55,305 3090.55,310 ; 3011.81,310 3069.8,310 3074.8,315 ; 3022.32,310 3043.27,310 3108.27,245 ; 3031.08,109.59 3031.08,93.21 3044.29,80 3122.05,80 ; 3048.23,125 3048.58,125 3088.58,85 ; 3050.2,110 3050.2,104.68 3069.88,85 ; 3346.46,1740 3520.51,1740 3530.51,1730 3515.51,1745 3375,1745 ; 3414.37,1620 3484.37,1690 3502.95,1690 ; 3424.21,1650 3474.21,1700 3489.17,1700 ; 3430.12,1673 3526.5,1673 3531.5,1678 3531.5,1721.16 3521.65,1731 ; 3435.04,1663 3527.48,1663 3532.48,1668 ; 3443.9,1664 3528.48,1664 3532.48,1668 ; 3455.71,1740 3459.71,1744 3530.51,1744 3542.51,1732 3544.29,1732 3546.26,1730.03 3546.26,1682 3532.48,1668.22 3532.48,1668 ; 3474.41,102.41 3474.41,224.33 3495.08,245 ; 3480.31,110 3546.26,110 ; 3532.48,1673.17 3532.48,1668 ; 3593.5,623 3600.53,623 3662.53,561 ; 3638.78,627.36 3638.78,617.09 3695.87,560 ; 3647.64,219 3647.64,250.12 ; 3647.64,588.94 3647.64,68.46 ; 3654.53,569 3662.53,561 ; 3669.29,637.28 3669.29,579.92 ; 3674.21,575 3669.29,579.92 ; 3687.01,610 3687.01,616.77 3735.24,665 ; 3687.01,655 3687.01,560.98 3687.99,560 ; 3688.98,595 3688.98,597.4 3776.57,685 ; 3696.85,580 3806.85,690 3808.07,690 ; 3715.55,690 3695.87,670.31 3695.87,555 ; 3822.83,475 3842.52,494.69 3842.52,776.03 3844.49,778 ; 3841.73,700.87 3695.87,555 ; 486.22,485 486.22,533.11 493.11,540 493.11,595.32 ; 486.22,485 493.11,491.89 493.11,595.32 ; 2385,1605 2385,1645 ; 2792.91,113.19 2806.1,100 2792.91,113.19 ; 2873.03,200 2919.53,200 2921.26,201.73 ; 3647.64,68.46 3647.64,69.28 3665.35,87 3665.35,575.98 3669.29,579.92 ; 3662.53,561 3672.24,561 3647.64,536.39 3647.64,510 3692.64,555 3695.87,555
  Bottom Layer w22.05: 1369.08,1009 1369.08,1016.65
  Bottom Layer w23.62: 215.55,1287 215.55,1248.91 221.46,1243 224.27,1243 233.27,1234 343.78,1234 388.78,1279 ; 537.4,996 537.4,1052.2 550.2,1065 620.05,1065 622.05,1063 623.81,1063 636.81,1050 636.81,744.84 626.97,735 ; 995,255 1135,255 1180,300 ; 1045,400 1045,490 ; 1058.07,921 1127.07,990 1406.5,990 ; 1060,455 1060,940 1125,1005 1430,1005 ; 1069.88,956 1069.88,463.95 1072.83,461 ; 1125,415 1060,415 1070,425 1135,425 ; 1125,430 1045,510 ; 1210,235 1230,255 1230,260 ; 1225,210 1230,215 1230,335 ; 1280,375 1240,415 1100,415 1045,470 1045,510 ; 1335,570 1337.5,567.5 ; 1350,580 1350,680 ; 1369.08,1009 1115.16,1009 1045,938.84 1045,510 ; 1440,570 1527.58,570 ; 1440,690 1527.58,690 ; 1540,692.42 1672.58,692.42 ; 1649.31,250.69 1685,215 1755,215 ; 1665,255 1685,275 1760,275 ; 1685,675 1695,675 ; 1775,455 1875,455 1900,430 ; 1790,445 1877.83,445 ; 1790,620 1815,645 1815,649.66 ; 1795,430 1875,430 1880,435 ; 1805,455 1860,455 1875,470 1915,470 1930,455 1930,415 1910,395 1882.58,395 1845,432.58 ; 1805,600 1805,639.66 1870.34,705 ; 1820,590 1820,635 1880,695 ; 1824.8,655 1830.8,661 1892.72,661 1941.93,710.21 1941.93,751.93 ; 1848.43,678 1848.43,735.11 1855.32,742 1855.32,745.41 1880.91,771 1943.87,771 1945.87,773 ; 1853.35,668 1884.61,668 1899.61,683 ; 1858.27,1062 1900.27,1104 2000.98,1104 ; 1880,1055 1921.66,1055 1958.66,1092 1903.54,1092 1918.06,1092 1934.06,1076 ; 1893.27,1097 1910.27,1114 2000,1114 2000.98,1113.02 2000.98,1091 ; 3451.77,270 3245.77,270 3201.77,314 3201.77,481.27 3218.5,498 3536.31,498 3543.31,491
  Bottom Layer w24.02: 1280,555 1280,650 1310,680 1350,680 ; 1300,665 1355,665
  Bottom Layer w31.5: 230,1530 230,1490 215,1475 215,1440 230,1425 255,1425 280,1450 280,1560 ; 280,1265 335,1265 ; 290.21,1255.21 395,1360 ; 352.36,1293 218,1293 220,1295 220,1260 225,1260 240,1245 350,1245 410,1305 410,1450 ; 542.64,1320.67 542.64,1262.36 570,1235 610,1235 635,1260 635,1290 615,1310 585,1310 557.5,1337.5 557.5,1442.5
  Bottom Layer w39.37: 75,670 75,660 240,495 ; 100,580 100,590 ; 100,605 105,605 ; 103.86,605 75,605 112.86,605 226.5,491.36 ; 115,300 110,295 105,295 115,285 210.61,285 ; 130.91,284 192.73,284 ; 135,560 65,560 30,595 30,670 65,705 90,705 257.5,537.5 ; 183.07,326 152.07,357 68.9,357 43.31,331.41 43.31,303 78.31,268 220.47,268 ; 223.43,494.43 232.86,485 262.8,485 282.48,504.68 282.48,537 253.48,566 227.36,566 ; 355.32,1256 420.28,1320.96 420.28,1462 ; 355.32,1303 381.89,1329.57 381.89,1464 ; 376.97,1305 376.97,1456 ; 528.54,1455 528.54,1263.76 543.31,1249 ; 541.34,334 634.84,427.5 634.84,462 ; 557.09,1380 557.09,1354.18 608.27,1303 ; 568.9,1305 570.87,1306.97 570.87,1442 ; 582.48,975 570,975 545,1000 545,1025 575,1055 600,1055 615,1040 615,885 ; 691.47,1465 720.47,1436 879.26,1436 907.63,1407.63 ; 777.56,1446 801.95,1446 877.95,1370 ; 810,1443.08 811.92,1443.08 900,1355 935,1355 ; 835,730 835,985 ; 835,1120 835,1335 907.63,1407.63 ; 877.72,1345 892.72,1330 ; 907.63,1410.71 907.63,1407.63 ; 940.94,1310 940.94,1290.39 1041.34,1190 ; 950.79,1240 950.79,1470 ; 1064.96,477 1064.96,474.21 1114.17,425 ; 1165,1635 1165,1375 1180,1360 1270,1360 ; 1215,1470 1270,1415 1270,1375 ; 1304.13,1402 1324.8,1422.67 1324.8,1610 ; 1308.03,1495 1308.03,1486.75 1388.78,1406 ; 1308.07,1542 1433.07,1667 1440.94,1667 ; 1310,1470 1310,1450 1325,1435 ; 1372.05,1628 1693.22,1628 1736.22,1671 ; 1410,1430 1435,1430 1455,1410 1455,1380 1440,1365 ; 1560.04,1695 1564.72,1695 ; 1630,1010 1680,1060 1695,1060 1715,1040 1715,930 1705,920 1650,920 1620,950 1620,1000 1665,1045 ; 1670.2,805.2 1725.2,805.2 1893.19,973.19 ; 1688.03,348 1688.03,433 ; 1690.94,1196 1690.94,1205.95 1940,1455 ; 1695.87,1179 1695.87,1186.38 1939.3,1429.82 ; 1735,790 1989.25,1044.25 1989.25,1097 1947.25,1055 1880,1055 1870,1045 1865,1045 1865,1005 1880,990 ; 1745,830 1910,995 ; 1802.17,1255 1950.52,1255 1967.52,1238 ; 1816.93,1231 1824.93,1223 2001.97,1223 2004.92,1225.95 2004.92,1488 1947.92,1545 1882.87,1545 ; 1832.68,1232 1987,1232 1990,1235 ; 1862.2,1524 1862.2,1353.79 1937.99,1278 ; 1865,965 1865,1025 ; 1870,425 1885,440 ; 1872.05,1270 1916.38,1270 ; 1891.73,1515 1891.73,1419.78 1905.51,1406 ; 1905.51,1370 1940.94,1405.43 1940.94,1440 ; 1911.42,1500 1911.42,1411.81 1923.23,1400 ; 1913.03,1520 1913.03,1516.96 1990.98,1439 ; 1929.13,1532 1929.13,1519.13 1983.27,1465 ; 1948.58,1235 1963.58,1250 ; 2111.22,1124 2140.75,1153.53 2140.75,1445 2186.02,1490.28 2186.02,1517 ; 2735,1530 2735,1580 2710,1605 2710,1640 2725,1655 2755,1655 2770,1640 2770,1595 2745,1570 ; 2742.13,1000 2742.13,952.8 2879.92,815 ; 2802.17,831.14 2997.13,831.14 3000.98,835 ; 2825.79,855 2995.98,855 3000.98,850 ; 2846.46,805 2971.46,805 ; 2909.45,817 2920.82,817 3073.82,970 ; 2916.81,727.85 2916.81,395.39 2911.42,390 2957.6,390 2962.6,395 2963.27,395 2983.27,415 2983.27,748.27 3000,765 ; 2921.26,1120 2921.26,1245.24 ; 2930.12,710 2949.45,710 3128.94,889.49 3128.94,1195 ; 2935.04,1300 2935.04,1302.2 3197.83,1565 ; 2941.93,645 2941.93,671.18 3135,864.25 3135,1215 ; 3054.13,905 3054.13,1192.91 3111.22,1250 ; 3057.09,475 3057.09,592.05 3365.16,900.12 3365.16,915 ; 3085.63,343.39 3113.19,370.94 3113.19,580 ; 3088.58,663 3089.36,663 3227.36,801 ; 3090.55,310 3057.09,343.46 3057.09,701.65 3057.09,704.03 3184.06,831 3395.65,831 3396.65,830 ; 3090.55,400 3090.55,354.45 3295,150 ; 3095.47,350 3110.51,350 ; 3097.44,1130 3102.63,1130 cw(c3102.63,1009.29) 3187.99,1094.64 ; 3103.35,485 3203.35,585 3212.6,585 ; 3105.31,465 3190.31,550 3224.41,550 ; 3113.19,942.91 3113.19,1198.19 3125,1210 ; 3113.19,1182 cw(c3113.19,1147.93) 3137.28,1172.02 3231.3,1078 ; 3117.13,330 3124.02,336.89 3124.02,585 ; 3118.11,550 3123.11,555 3154.53,555 3259.33,555 3274.61,570.28 3274.61,690 ; 3122.05,769 3123.09,769 3244.09,890 3424.18,890 3426.18,892 ; 3124.02,1170 3199.8,1170 ; 3130.91,1163.78 3160.81,1193.68 3160.81,1216.61 ; 3134.51,1113.64 3306.27,941.88 3375.12,941.88 ; 3141.73,1160.09 3141.73,1185 ; 3149.61,1530 3214.41,1530 3224.41,1540 3224.41,1665 ; 3173.23,580 3244.92,580 3248.03,576.89 3248.03,695 ; 3185,1605 3185,1627.05 3252.95,1695 ; 3185.04,1101 cw(c3185.04,1095.09) 3190.94,1095.09 ; 3185.04,1127 3185.04,1011.96 3250,947 3370,947 3375.12,941.88 ; 3207.68,1625 3207.95,1625 3252.95,1670 ; 3210.63,650.39 3210.63,613.7 3229.33,595 ; 3215.55,220 3385.28,220 ; 3215.55,1675 3385.75,1675 3390.75,1670 ; 3218.5,380 3218.5,311.57 3250.08,280 3450.79,280 ; 3220.47,475 3560.55,475 3575.79,459.76 3575.79,404.68 ; 3225.39,1125 3225.39,1062.56 3377.95,910 3377.95,889.84 ; 3232.28,851 3329.52,851 3342.52,864 ; 3242.13,295 3245.75,295 3265.75,275 3481.3,275 ; 3251.89,1115 3256.89,1120 ; 3264.76,370 3541.1,370 ; 3265.75,810 3203.58,810 3088.58,695 3088.58,572.72 3070.87,555 3070.87,619.33 3166.34,714.8 3166.34,770 3187.01,790.67 3187.01,886 3190.85,889.84 3377.95,889.84 ; 3268.7,385 3556.1,385 3575.79,404.68 ; 3293.7,166.81 3396.65,166.81 ; 3296.26,781.26 3298.23,783.23 ; 3305.12,315 3519.49,315 3594.49,240 3594.49,123.27 3591.22,120 3519.45,120 3498.03,141.42 3498.03,235 ; 3324.8,810 3331.69,816.89 ; 3335.63,947 3185.04,1097.59 3185.04,950.81 3193.98,941.88 3375.12,941.88 ; 3338.58,1690 3341.57,1690 3401.57,1630 ; 3349.14,953.68 3385.83,917 ; 3350.39,850.75 3366.14,835 ; 3367.65,881 ccw(c3367.65,910) 3396.65,910 ; 3387.8,932.6 3387.8,880 3377.95,889.84 ; 3389.65,938 3393.65,934 3396.65,931 ; 3421.26,425 3456.1,425 3556.1,525 ; 3436.08,290 3436.08,271.24 3542.32,165 ; 3531.5,440 3544.29,452.8 3544.29,555 ; 3551.61,425 3551.61,548.62 3562.01,559.02 3577.36,559.02 3587.6,548.78 3587.6,416.5 3541.1,370 ; 3651.57,420 3651.57,437.83 3703.74,490 ; 3652.56,953 3666.34,966.78 3666.34,1136 ; 3653.54,392 3745.08,483.54 3745.08,488 ; 3541.1,370 3575.79,404.68 ; 1444.33,1025 ccw(c1420,1025) 1444.33,1025
  Bottom Layer w59.06: 1882.36,1512.64 1990,1405 ; 1890,1295 1970,1295 ; 1905,1305 1920,1305 ; 1909.78,1335 1925,1335 1965,1375 1965,1415 ; 1925,735 2345,1155 2345,1625 ; 1935,1285 1960,1285 1990,1255 ; 2125,1148.13 2125,1467.36 2177.64,1520 ; 2225,1685 2240,1685 2340,1585 ; 2740,1620 2740,893.31 2918.31,715
  Bottom Layer w78.74: 235,965 235,1025 260,1050 275,1050 290,1035 290,1015 245,970 ; 267.52,1009.17 267.52,1007.52 235,975 235,720 255,700 345,700 445,600 445,505 ; 580.28,265.28 636.85,321.85 636.85,740 600,776.85 600,990 ; 1210,1400 1235,1400 1290,1455 1290,1610 1365,1685 2285,1685 2345,1625 ; 1290,1420 1290,1500 ; 2895,985 2895,1410 3200,1715 3375,1715 3410,1680 3410,1560 ; 2895,1000 2895,1380 3205,1690 ; 2905,975 2925,975 2940,990 2940,1355 3160,1575 ; 2916.81,431.59 2916.81,727.76 ; 2916.81,727.85 2921.71,727.85 ; 2916.81,1023.13 2916.81,1318.41 2916.81,1396.81 3100,1580 3195,1580 3185,1590 3185,1670 3225,1710 3360,1710 3410,1660 3410,1585 ; 2949.8,702.72 2949.8,445 2914.8,410 2893.7,410 2893.7,734.84 3103.54,944.68 ; 3076.77,561.81 3169.96,655 3186.02,655 ; 3085.63,343.39 3085.63,570.63 3444.61,929.61 3456.69,929.61 ; 3086.61,927.76 3086.61,1193.19 3123.43,1230 3161.5,1230 3178.15,1213.35 ; 3107.2,288.94 3246.14,150 3385,150 ; 3107.2,546.97 3445.81,885.57 3445.81,920.81 ; 3123.03,283.7 3236.73,170 3392.72,170 ; 3124.02,563.78 3149.61,589.37 ; 3165,1220.81 3160.81,1216.61 3169.69,1216.61 3456.69,929.61 ; 3199.8,1170 3440.2,929.61 3456.69,929.61 ; 3235.24,335 3235.24,450 ; 3240.16,319.84 3240.16,391.38 3288.78,440 3519.21,440 3549.21,410 3489.61,410 3301.34,410 3245,353.66 3245,340 ; 3245,316.73 3245,340 ; 3264.96,340 3245,340 ; 3364.17,170 3393.46,170 ; 3404.53,865 3422.24,882.72 3422.24,950 ; 3490.2,280 3557,213.2 3557,150 ; 3522.64,436.57 3539.61,436.57 3551.18,425
  other v1: 3768.7,130 129.92,134 3681.1,1558 133.86,1642

## Keep-outs
Keep-Out Layer:
  the board outline again, w10

## Other copper
Bottom Layer:
  rectangle net NetD1_+: 1685.04,580 1722.44,690
  rectangle net GND1: 1171.26,1375 1432.09,1445
  rectangle net GND: 2868.11,405 2950.79,765.2
  rectangle net NetC7_2: 3343.5,655 3404.53,680
  rectangle net GND: 3065.94,283.7 3123.03,565
  rectangle net GND: 2876.97,405 2950.79,765
  rectangle net GND: 3057.09,295 3119.09,592.05
  rectangle net NetC7_2: 3662.4,645 3756.89,700
  rectangle net NetC9_1: 2689.96,190 2804.13,235
  rectangle net NetR15_1: 2914.37,100 2953.74,220
  rectangle net GND: 2951.77,283.7 3123.03,325
  rectangle net NetRX2_2: 340,895 490,955
  rectangle net NetRX1_2: 340,795 480,855
  rectangle net NetQ1_S: 1630,940 1710,1030
  rectangle net GND1: 1280,320 1375,375
  rectangle net GND1: 1280,200 1310,320
  rectangle net NetRf1_1: 1015,295 1135,355
  rectangle net NetC2_1: 1717.5,215 1770,277.5
  rectangle net NetC6_1: 3385.75,1675 3540.35,1735
  rectangle net NetC6_2: 3479.33,1335 3546.26,1605
  rectangle net NetC7_2: 3273.62,1340 3409.45,1500
  rectangle net NetC7_2: 3280.51,1340 3402.56,1485
  rectangle net NetC7_2: 3297.24,1190 3362.2,1345
  rectangle net NetC7_2: 3336.61,1140 3565.94,1250
  rectangle net NetC7_2: 3522.64,1047.2 3593.5,1160
  rectangle net NetC7_2: 3603.35,670 3821.85,1040
  rectangle net NetC7_2: 3769.69,990 3825.79,1065
  rectangle net NetC7_2: 3498.03,670 3639.76,785
  rectangle net NetC7_2: 3422.24,1120 3730.31,1305
  rectangle net NetC7_2: 3554.13,717 3840.55,993
  rectangle net VCC: 3240.16,307 3318.9,391.38
  rectangle net VCC: 3216.54,312 3262.8,449
  rectangle net NetC1_1: 850.39,1372 941.93,1485
  rectangle net NetC2_1: 1788.39,285 1845.47,363
  rectangle net NetC5_2: 2094.49,1074 2159.45,1238
  rectangle net GND: 3079.72,263 3140.75,396
  rectangle net GND: 3092.52,262 3156.5,521
  rectangle net NetNR1_2: 62.99,306 151.57,377
  rectangle net GND1: 200.79,1386 296.26,1484
  rectangle net NetC1_1: 645.67,1386 952.76,1490
  rectangle net NetDB1_N: 355.32,1329 442.91,1493
  rectangle net NetDB1_L: 501.97,1221 590.55,1487
  rectangle net NetNR1_2: 96.46,247 306.1,362
  rectangle net NetC1_1: 1915.35,1212 2023.62,1460
  rectangle net NetC5_2: 2094.49,1068 2156.5,1476
  rectangle: 3187.99,951 3246,1009
  rectangle net NetC7_2: 3319.88,610 3638.78,665.98
  rectangle net NetC7_2: 3665.35,465 3834.65,658
  rectangle net NetC7_2: 3735.24,617 3840.55,731
  rectangle net GND1: 1171.26,1360 1435.47,1445
  rectangle net NetC9_2: 2717.52,89 2836.61,138

## Silkscreen, mask and mechanical layers (free items; w line width, h text height)
Top Overlay:
  circle w10: c129.92,134 r118.11
  circle w10: c129.92,134 r68.9
  circle w10: c133.86,1642 r68.9
  circle w10: c133.86,1642 r118.11
  circle w10: c3768.7,130 r68.9
  circle w10: c3768.7,130 r118.11
  circle w10: c3681.1,1558 r68.9
  circle w10: c3681.1,1558 r118.11
  lines w10: 1070.87,0 1565,0 ; 3092.64,1692.91 3818.9,1692.91 ; 1565,0 1565,1765 1486.26,1765 1486.26,80 1068.9,80 1068.9,0 1565,0 ; 3818.9,1692.91 3818.9,267 3897.64,267 3897.64,1771.65 2855,1771.65 2855,1692.91 3818.9,1692.91
  lines w31.5: 1420,1025 1420,1395
  text "L" at 53.15,778 h59.06 r270
  text "AC" at 47.24,534 h39.37 r270
  text "N" at 53.15,441 h59.06 r270
  text "V-" at 3312.99,44 h39.37
  text "DC" at 3426.18,44 h39.37
  text "V+" at 3538.39,44 h39.37
Bottom Overlay:
  circle w10: c991.14,58 r42.75
  circle w10: c3750,1386 r42.75
  circle w10: c94.49,1431 r42.75
Bottom Solder:
  circle w19.68: c991.14,58 r29.53
  circle w19.68: c3750,1386 r29.53
  circle w19.68: c94.49,1431 r29.53
  lines w39.37: 2916.81,727.85 2919.23,727.85 ; 3107.2,340 3107.2,561.97 3107.22,561.98 ; 3300,1355 3305,1360 3305,1580 ; 3400.59,1582.84 3403.43,1580 ; 3504.87,1699 3507.87,1702
  text "DESIGN:ZYC" at 990.16,1669 h59.06
Mechanical 1:
  circle w7.87: c2424.21,885 r39.37
  circle w7.87: c2424.21,1020 r39.37
  circle w7.87: c2505.91,1120 r39.37
  circle w7.87: c2564.96,1230 r39.37
  circle w7.87: c2569.88,1365 r39.37
  circle w7.87: c2424.21,762.5 r39.37
  circle w7.87: c2424.21,395 r39.37
  circle w7.87: c2424.21,517.5 r39.37
  circle w7.87: c2424.21,640 r39.37

## Text inside footprints (layer, text, board x,y; h text height)
C2: Top Overlay "+" at 1670,213 h39.37 r90
C10: Top Overlay "+" at 3218.2,404 h60
D1: Bottom Overlay "-" at 1481.93,534.94 h39.37 r270